# Altium PCB PCB_Open Pull PCB_2022-07-26.pcbdoc
Units mm, origin at the board's own origin, x right, y up, seen from the top; angles counter-clockwise.
Board outline 142.8 x 122.4 mm, 2 copper layers (Top Layer, Bottom Layer); 17 components, 38 nets, 116 pads, 0 vias.
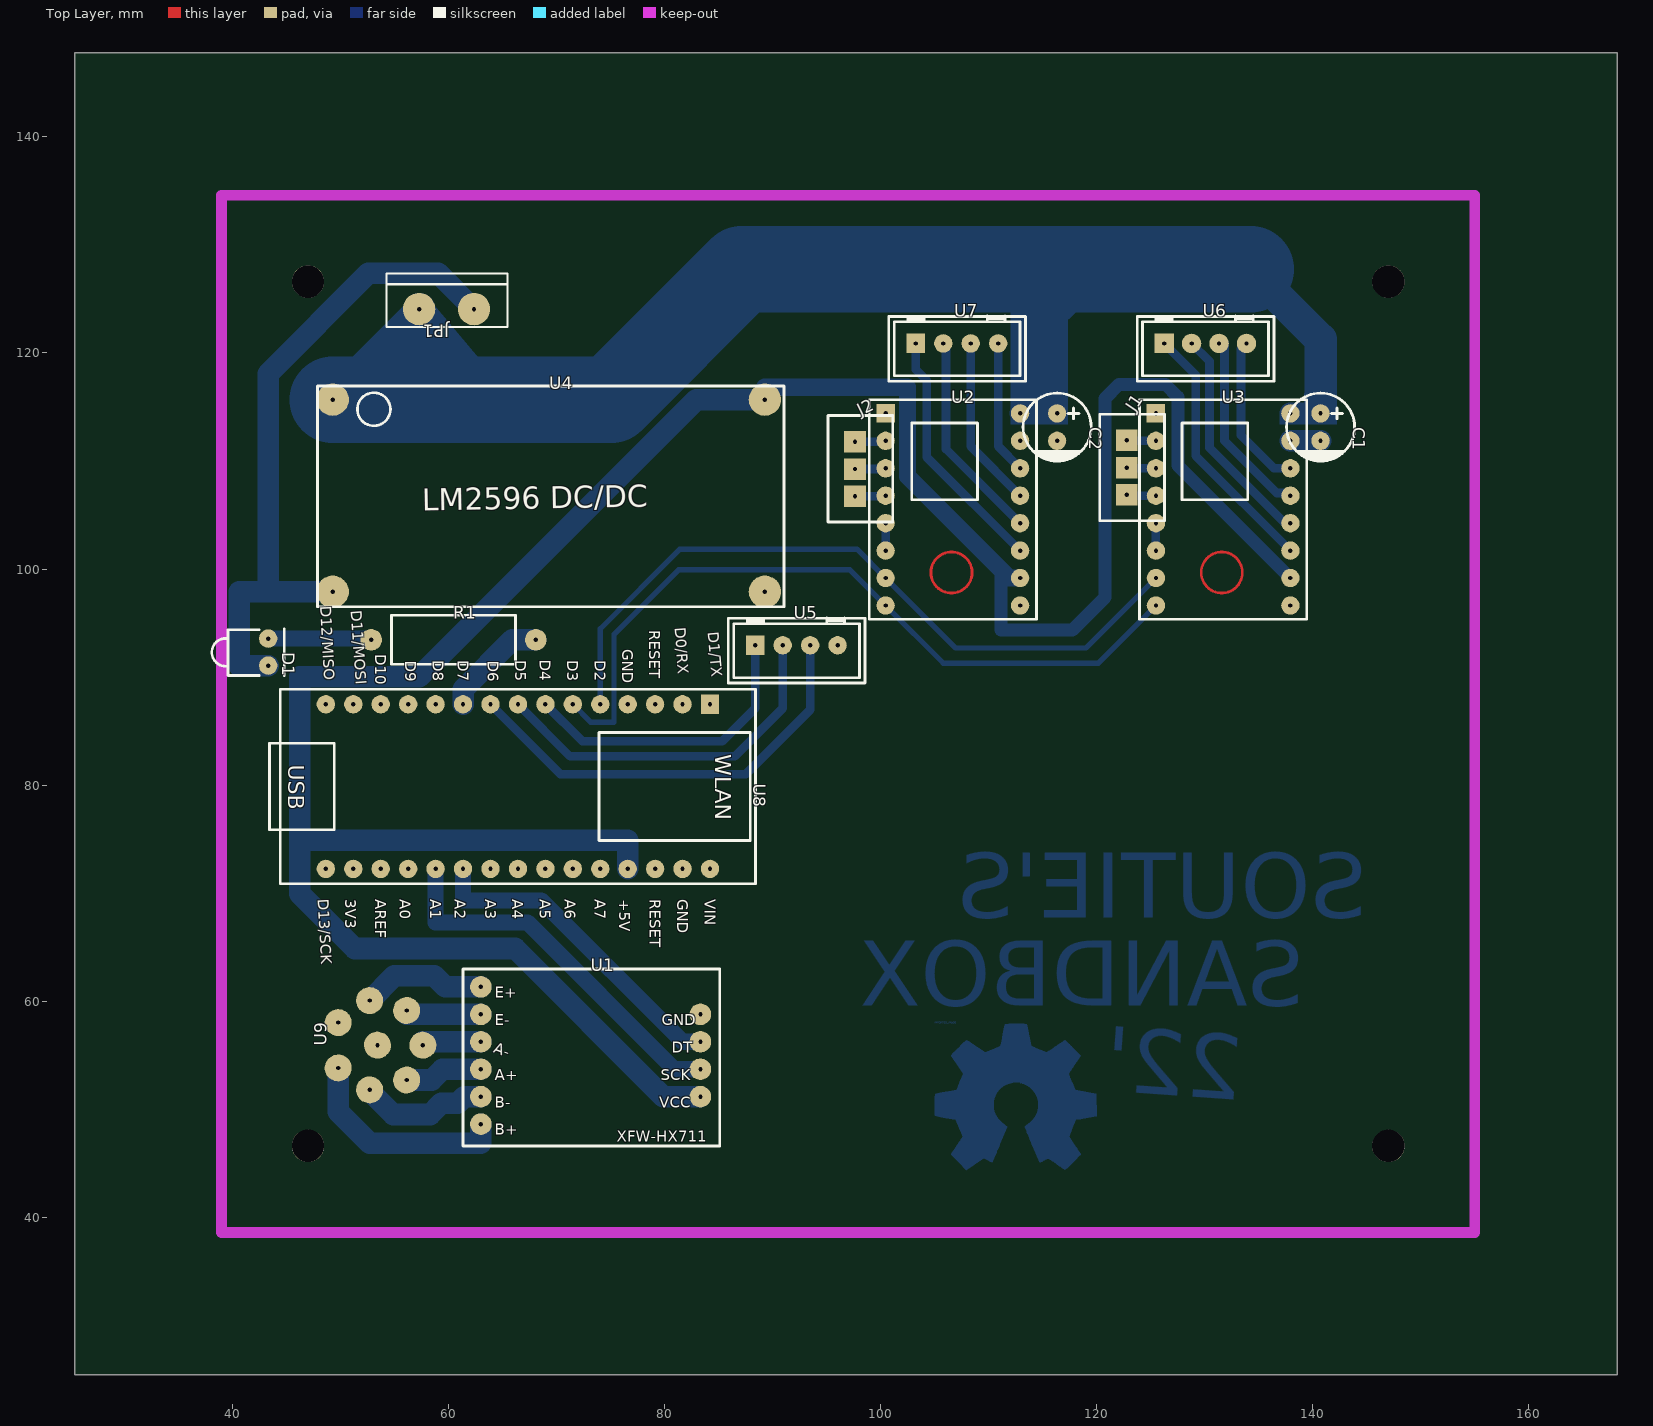
[diagram p0: Top Layer view]
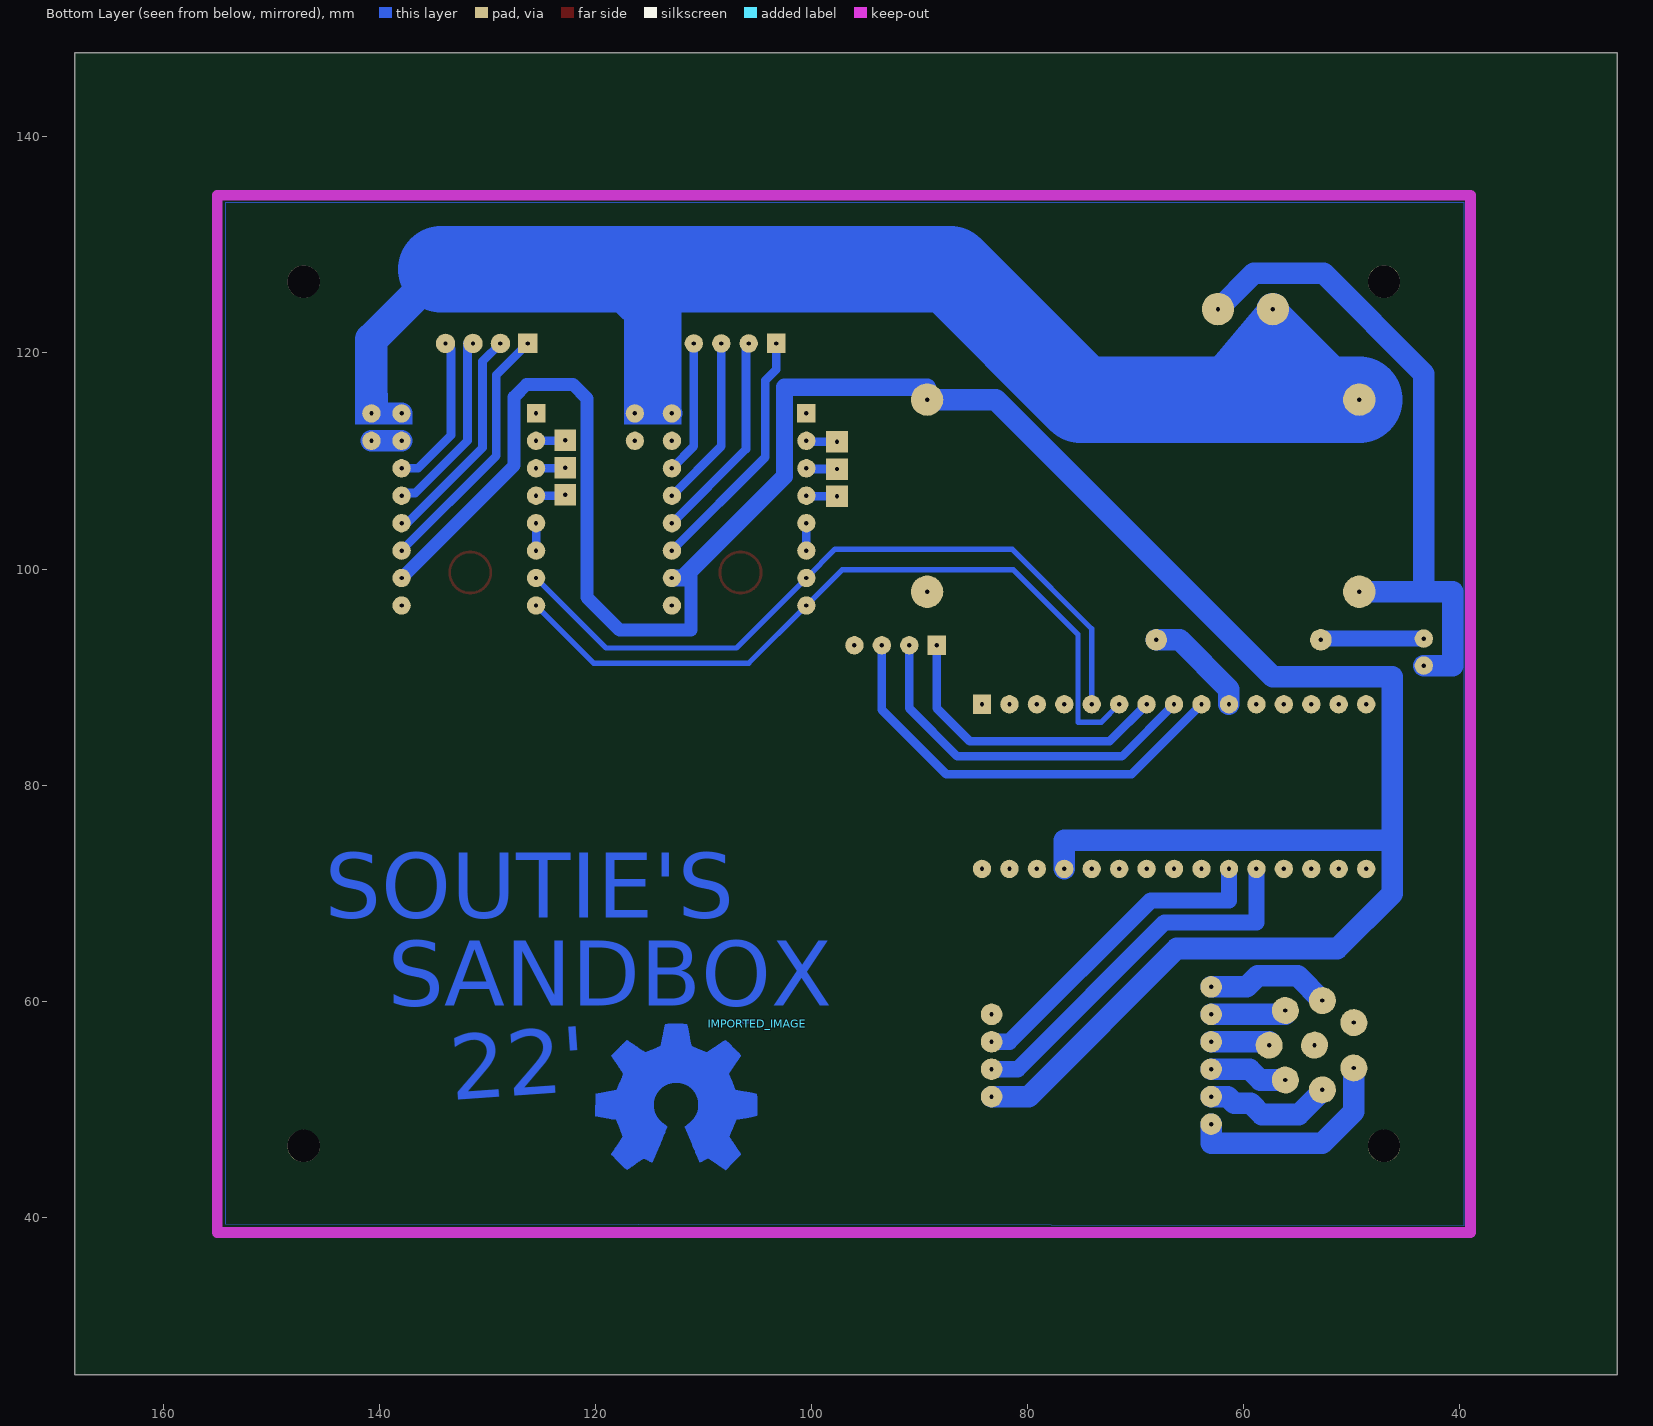
[diagram p1: Bottom Layer view, seen from below]

## Layer stack, top to bottom
Top Layer: signal copper (thickness not stored)
Dielectric: dielectric 0.32, FR-4, Dk 4.8
Bottom Layer: signal copper (thickness not stored)

## Board outline
168.202,25.4 25.4,25.4 25.4,147.8 168.202,147.8

## Components (designator, comment, footprint, x,y, rotation, side; value= is the part's Value field where it differs from the comment)
C1 "100uF 25v" 100UF/25V 140.729,113.137 r270 top
C2 "100uF 25v" 100UF/25V 116.345,113.137 r270 top
D1 "3MM GREEN TH LED 5600 COPY" LED-TH_LED-DP2-2LED 43.32,92.309 r270 top
IMPORTED_IMAGE "IMPORTED_IMAGE" IMPORTED_IMAGE 105.006,57.909 r0 bottom
J1 "JST-XH 3P" 3PIN_2.54_MM_JST_XHP_JST_CONNECTOR_FOR_DC_SOCKET 120.282,114.28 r0 top
J2 "JST-XH 3P" 3PIN_2.54_MM_JST_XHP_JST_CONNECTOR_FOR_DC_SOCKET 95.136,114.153 r0 top
JP1 "M025MM-X" SCREWTERMINAL-5MM-2-X 62.37,124.059 r180 top
R1 "ResistorToday" AXIAL-0.6 60.465,93.452 r0 top
U1 "HX711-MODULE" HX711-MODULE 63.005,48.621 r0 top
U2 "A4988 Stepper Motor Module" A4988MODULE 98.946,115.677 r0 top
U3 "A4988 Stepper Motor Module" A4988MODULE 123.965,115.677 r0 top
U4 "LM2596 DC DC BUCK CONVERTER COPY" LM2596 47.892,116.947 r0 top
U5 "JST4-2.54" JST4-2.54#1 90.945,92.944 r0 top
U6 "JST4-2.54" JST4-2.54#2 128.791,120.884 r0 top
U7 "JST4-2.54" JST4-2.54#1 105.804,120.884 r0 top
U8 "ARDUINO_NANO_33_IOT" ARDUINO_NANO_33_IOT 66.434,79.863 r270 top
U9 "GX16-8-F" GX16-8-2A 53.48,55.86 r90 top

## Footprints (in the part's own frame and the unit in brackets; to place one, negate y for a bottom-side part, rotate by r counter-clockwise, add the part's x,y. Pads: shape width x height; smd on the part's side, far side on the other; paste and mask are expansions set on the pad)
3PIN_2.54_MM_JST_XHP_JST_CONNECTOR_FOR_DC_SOCKET [mm]
  rect 2x2 hole 0.4: 1(2.499,-2.359) 2(2.499,-4.899) 3(2.497,-7.408)
  silkscreen extent 0,-9.8 6,0.05
100UF/25V [mm]
  round 1.7 hole 0.4: 1(-1.27,0) 2(1.27,0)
  silkscreen extent -3.15,-3.15 3.17,3.15
A4988MODULE [mm]
  rect 1.7x1.7 hole 0.4: 1(1.524,-1.27)
  round 1.7 hole 0.4: 2(1.524,-3.81) 3(1.524,-6.35) 4(1.524,-8.89) 5(1.524,-11.43) 6(1.524,-13.97) 7(1.524,-16.51) 8(1.524,-19.05) 9(13.97,-19.05) 10(13.97,-16.51) 11(13.97,-13.97) 12(13.97,-11.43) 13(13.97,-8.89) 14(13.97,-6.35) 15(13.97,-3.81) 16(13.97,-1.27)
  Top Layer circle w0.254: c7.62,-16.002 r1.905
  silkscreen extent 0,-20.32 15.49,0
ARDUINO_NANO_33_IOT [mm]
  rect 1.778x1.7 hole 0.4: 1(-7.62,17.78)
  round 1.7 hole 0.4: 2(-7.62,15.24) 3(-7.62,12.7) 4(-7.62,10.16) 5(-7.62,7.62) 6(-7.62,5.08) 7(-7.62,2.54) 8(-7.62,0) 9(-7.62,-2.54) 10(-7.62,-5.08) 11(-7.62,-7.62) 12(-7.62,-10.16) 13(-7.62,-12.7) 14(-7.62,-15.24) 15(-7.62,-17.78) 16(7.62,-17.78) 17(7.62,-15.24) 18(7.62,-12.7) 19(7.62,-10.16) 20(7.62,-7.62) 21(7.62,-5.08) 22(7.62,-2.54) 23(7.62,0) 24(7.62,2.54) 25(7.62,5.08) 26(7.62,7.62) 27(7.62,10.16) 28(7.62,12.7) 29(7.62,15.24) 30(7.62,17.78)
  silkscreen extent -9,-23 9,22
AXIAL-0.6 [mm]
  round 2 hole 0.4: 1(-7.62,0) 2(7.62,0)
  silkscreen extent -5.74,-2.26 5.74,2.26
GX16-8-2A [mm]
  round 2.5 hole 0.4: 1(-2.041,3.684) 2(-4.069,0.775) 3(-3.158,-2.653) 4(0.066,-4.155) 5(3.275,-2.653) 6(4.195,0.775) 7(2.159,3.683) 8(0.067,0.045)
HX711-MODULE [mm]
  round 2 hole 0.4: 1(20.32,10.16) 2(20.32,7.62) 3(20.32,5.08) 4(20.32,2.54) 5(0,12.7) 6(0,10.16) 7(0,7.62) 8(0,5.08) 9(0,2.54) 10(0,0)
  silkscreen extent -1.65,-2.03 22.1,14.35
IMPORTED_IMAGE [mm]
  Top Layer region: 1312 vertices and 0 holes, not listed, extent -0.002,0 15.003,13.538
JST4-2.54#1 [mm]
  rect 1.7x1.8 hole 0.4: 1(-2.54,0)
  round 1.7 hole 0.4: 2(0,0) 3(2.54,0) 4(5.08,0)
  silkscreen extent -5.04,-3.5 7.62,2.53
JST4-2.54#2 [mm]
  rect 1.8x1.8 hole 0.4: 1(-2.54,0)
  round 1.8 hole 0.4: 2(0,0) 3(2.54,0) 4(5.08,0)
  silkscreen extent -5.04,-3.5 7.62,2.53
LED-TH_LED-DP2-2LED [mm]
  round 1.7 hole 0.4: 1(-1.25,0) 2(1.25,0)
  silkscreen extent -2.13,-5.22 2.17,1.48
LM2596 [mm]
  round 3 hole 0.4: 1(1.397,-1.27) 2(1.397,-19.05) 3(41.397,-19.05) 4(41.397,-1.27)
  silkscreen extent 0,-20.45 43.18,0
SCREWTERMINAL-5MM-2-X [mm]
  round 3 hole 0.4: 1(0,0) 2(5.08,0)
  silkscreen extent -3.1,-3.3 8.1,1.66

## Free pads (board coordinates)
  round 3 hole 3 unplated: ""(47.002,46.6) ""(47.002,126.6) ""(147.002,46.6) ""(147.002,126.6)

## Nets (pads, with @x,y where several pads share a name; then routed paths per layer and width w, separated by ;. In a path a pad name is that pad's centre, name@x,y a point inside that pad or via, vN(x,y) a via of type N, cw(c..) or ccw(c..) an arc to the next point about the centre after c; other vN are vias at no path point)
+5V: U1.4 U2.10 U3.10 U4.4 U8.27 | length 257.3
  Bottom Layer w1.2: 110.249,100.691 111.138,99.802 111.138,94.341 117.742,94.341 120.79,97.389 120.79,115.804 122.06,117.074 126.378,117.074 127.521,115.931 127.521,109.581 U3.10
  Bottom Layer w1.6: U4.4 89.289,116.82 102.502,116.82 102.502,108.565 111.9,99.167 U2.10
  Bottom Layer w2: 46.241,70.973 46.241,90.023 57.29,90.023 82.944,115.677 U4.4 ; U8.27 76.594,74.91 46.241,74.91 46.241,69.957 51.321,64.877 66.18,64.877 79.896,51.161 U1.4
+24V: C1.1 C2.1 JP1.2 U2.16 U3.16 U4.1 | length 177.8
  Bottom Layer w2: U2.16 C2.1 ; U3.16 C1.1
  Bottom Layer w3: 59.576,115.677 U4.1 57.29,123.678 JP1.2 57.29,123.798 64.094,115.677 ; 114.821,115.55 114.821,127.742 113.678,127.742 134.252,127.742 140.729,121.265 140.729,115.55
  Bottom Layer w8: U4.1 75.07,115.677 87.135,127.742 134.252,127.742
CLK: U1.3 U8.20 | length 35.1
  Bottom Layer w1.5: U8.20 58.814,67.29 67.323,67.29 80.912,53.701 U1.3
D1_1: D1.1 R1.1 | length 9.6
  Bottom Layer w1.5: D1.1 52.738,93.559 R1.1
DAT: U1.2 U8.21 | length 30.3
  Bottom Layer w1.5: U8.21 61.354,69.322 68.593,69.322 81.674,56.241 U1.2
DIR: U2.8 U3.8 U8.6 | length 71
  Bottom Layer w0.5: U8.6 73.165,85.832 75.324,85.832 75.324,93.96 81.293,99.929 97.168,99.929 U2.8 105.804,91.293 120.155,91.293 U3.8
GND: C1.2 C2.2 D1.2 JP1.1 U1.1 U2.9 U2.15 U3.9 U3.15 U4.2 U4.3 U5.4 U8.4 U8.29 U9.7 U9.8 | length 68.4
  Bottom Layer w2: D1.2 40.653,91.059 40.653,97.897 U4.2 ; 46.368,97.897 43.32,97.897 43.32,118.09 52.591,127.361 59.068,127.361 JP1.1 ; U3.15 C1.2
MS1: J1.1 U3.2 | length 2.7
  Bottom Layer w0.8: J1.1 122.834,111.867 U3.2
MS2: J1.2 U3.3 | length 2.8
  Bottom Layer w0.8: J1.2 122.781,109.327 U3.3
MS3: J1.3 U3.4 | length 2.7
  Bottom Layer w0.8: J1.3 122.864,106.787 U3.4
MS11: J2.1 U2.2 | length 2.9
  Bottom Layer w0.8: J2.1 100.397,111.793 U2.2
MS22: J2.2 U2.3 | length 2.9
  Bottom Layer w0.8: J2.2 100.397,109.253 U2.3
MS33: J2.3 U2.4 | length 2.9
  Bottom Layer w0.8: J2.3 100.428,106.745 U2.4
R1_2: R1.2 U8.10 | length 10
  Bottom Layer w2: U8.10 61.354,88.88 65.926,93.452 R1.2
S$4914: 
S$4918: 
S$4925: 
S$4929: 
STEP: U2.7 U3.7 U8.5 | length 67.9
  Bottom Layer w0.5: U8.5 74.054,94.468 81.42,101.834 97.803,101.834 U2.7 106.947,92.69 119.012,92.69 U3.7
U1_5: U1.5 U9.6 | length 11.7
  Bottom Layer w2: U9.6 54.987,62.337 58.687,62.337 59.703,61.321 U1.5
U1_6: U1.6 U9.5 | length 7.2
  Bottom Layer w2: U9.5@56.132,59.134 56.132,58.781 U1.6
U1_7: U1.7 U9.4 | length 5.7
  Bottom Layer w2: U9.4 57.635,56.241 U1.7
U1_8: U1.8 U9.3 | length 7.3
  Bottom Layer w2: U9.3@56.132,52.7 58.448,52.7 59.449,53.701 U1.8
U1_9: U1.9 U9.2 | length 12
  Bottom Layer w2: U9.2 52.705,51.682 54.877,49.51 58.306,49.51 59.342,50.546 60.866,50.546 61.481,51.161 U1.9
U1_10: U1.10 U9.1 | length 20.2
  Bottom Layer w2: U9.1 49.797,49.764 52.718,46.843 63.005,46.843 U1.10
U2_5: U2.5 U2.6 | length 2.5
  Bottom Layer w0.8: U2.6 U2.5
U2_11: U2.11 U7.1 | length 23.2
  Bottom Layer w0.8: U7.1 103.264,118.471 104.28,117.455 104.28,110.343 U2.11
U2_12: U2.12 U7.2 | length 19.7
  Bottom Layer w0.8: U7.2 106.058,120.884 106.058,111.105 U2.12
U2_13: U2.13 U7.3 | length 16
  Bottom Layer w0.8: U7.3 108.344,111.359 U2.13
U2_14: U2.14 U7.4 | length 12.4
  Bottom Layer w0.8: U7.4 110.884,111.359 U2.14
U3_5: U3.5 U3.6 | length 2.5
  Bottom Layer w0.8: U3.6 U3.5
U3_11: U3.11 U6.1 | length 24
  Bottom Layer w0.8: U6.1 129.172,117.963 129.172,110.47 U3.11
U3_12: U3.12 U6.2 | length 20.7
  Bottom Layer w0.8: U6.2 130.442,119.233 130.442,111.232 137.427,104.247 U3.12
U3_13: U3.13 U6.3 | length 17.7
  Bottom Layer w0.8: U6.3 131.839,120.884 131.839,111.867 136.665,107.041 137.681,107.041 U3.13
U3_14: U3.14 U6.4 | length 14.6
  Bottom Layer w0.8: U6.4 133.363,120.376 133.363,112.375 136.411,109.327 U3.14
U5_1: U5.1 U8.7 | length 28
  Bottom Layer w0.8: U8.7 72.403,84.054 85.357,84.054 88.405,87.102 U5.1
U5_2: U5.2 U8.8 | length 34.2
  Bottom Layer w0.8: U8.8 71.26,82.657 86.5,82.657 90.945,87.102 U5.2
U5_3: U5.3 U8.9 | length 40.7
  Bottom Layer w0.8: U8.9 70.371,81.006 87.516,81.006 93.485,86.975 U5.3
pads on no net: U2.1 U3.1 U8.1 U8.2 U8.3 U8.11 U8.12 U8.13 U8.14 U8.15 U8.16 U8.17 U8.18 U8.19 U8.22 U8.23 U8.24 U8.25 U8.26 U8.28 U8.30

## Polygon pours and split planes (outlines as drawn)
GND on Bottom Layer (solid): 154.191,39.35 154.191,133.965 39.637,133.965 39.637,39.223

## Other copper
Bottom Layer:
  region net +24V: 62.116,115.677 62.116,118.972 58.938,122.15 55.763,122.15 53.67,120.058
  region net +24V: 136.284,125.71 119.52,125.71 120.409,127.742 134.252,127.742 136.03,125.837 135.395,125.964
  region net +24V: 119.647,126.091 120.297,125.832 119.901,125.837 119.444,125.989 119.393,125.964 119.139,126.091 119.444,125.989 119.647,126.091
  region net +24V: 117.107,122.852 119.139,124.757 120.409,125.9 121.679,126.916 121.679,127.805 113.551,127.805
  rectangle net +24V: 136.919,113.391 142.253,114.534
  rectangle net +24V: 139.205,113.391 142.253,116.312
  rectangle net +24V: 112.027,113.391 117.361,126.98
  text "SOUTIE'S" at 145.047,67.719 h6
  text "SANDBOX" at 139.205,59.591 h6
  text "22'" at 133.281,50.835 h6 r356

## Silkscreen, mask and mechanical layers (free items; w line width, h text height)
Document:
  lines w0.003: 96.801,86.6 96.801,86.6

## Text inside footprints (layer, text, board x,y; h text height)
U1: Top Overlay "XFW-HX711" at 75.578,46.978 h1; Top Overlay "E+" at 64.275,60.313 h1; Top Overlay "E-" at 64.275,57.773 h1; Top Overlay "A-" at 64.104,55.263 h1 r340; Top Overlay "A+" at 64.275,52.693 h1; Top Overlay "B-" at 64.275,50.153 h1; Top Overlay "B+" at 64.275,47.613 h1; Top Overlay "GND" at 79.769,57.773 h1; Top Overlay "DT" at 80.658,55.233 h1; Top Overlay "SCK" at 79.642,52.693 h1; Top Overlay "VCC" at 79.515,50.153 h1
U4: Top Overlay "LM2596 DC/DC" at 57.562,105.39 h2.03 r1
U8: Top Overlay "D1/TX" at 83.985,94.137 h1.02 r275; Top Overlay "GND" at 81.166,69.449 h1.02 r270; Top Overlay "+5V" at 75.832,69.449 h1.02 r270; Top Overlay "D12/MISO" at 48.147,96.547 h1.02 r273; Top Overlay "VIN" at 83.706,69.449 h1.02 r270; Top Overlay "D13/SCK" at 47.893,69.422 h1.02 r273; Top Overlay "GND" at 76.086,92.555 h1.02 r270; Top Overlay "D0/RX" at 80.936,94.559 h1.02 r274; Top Overlay "RESET" at 78.58,94.318 h1.02 r270; Top Overlay "D2" at 73.546,91.557 h1.02 r270; Top Overlay "D3" at 71.006,91.557 h1.02 r270; Top Overlay "D4" at 68.466,91.603 h1.02 r270; Top Overlay "D5" at 66.18,91.557 h1.02 r270; Top Overlay "D6" at 63.64,91.511 h1.02 r270; Top Overlay "D7" at 60.846,91.557 h1.02 r270; Top Overlay "D8" at 58.56,91.557 h1.02 r270; Top Overlay "D9" at 56.02,91.511 h1.02 r270; Top Overlay "D10" at 53.226,92.093 h1.02 r270; Top Overlay "D11/MOSI" at 50.941,96.121 h1.02 r274; Top Overlay "3V3" at 50.432,69.449 h1.02 r270; Top Overlay "AREF" at 53.226,69.449 h1.02 r270; Top Overlay "A0" at 55.512,69.449 h1.02 r270; Top Overlay "A1" at 58.306,69.449 h1.02 r270; Top Overlay "A2" at 60.592,69.449 h1.02 r270; Top Overlay "A3" at 63.386,69.449 h1.02 r270; Top Overlay "A4" at 65.926,69.449 h1.02 r270; Top Overlay "A5" at 68.466,69.449 h1.02 r270; Top Overlay "A6" at 70.752,69.449 h1.02 r270; Top Overlay "A7" at 73.546,69.449 h1.02 r270; Top Overlay "RESET" at 78.626,69.449 h1.02 r270; Top Overlay "USB" at 45.184,81.863 h1.5 r270; Top Overlay "WLAN" at 84.684,82.863 h1.5 r270